# EAGLE board charlie_matrix_30 (EAGLE 5.11)
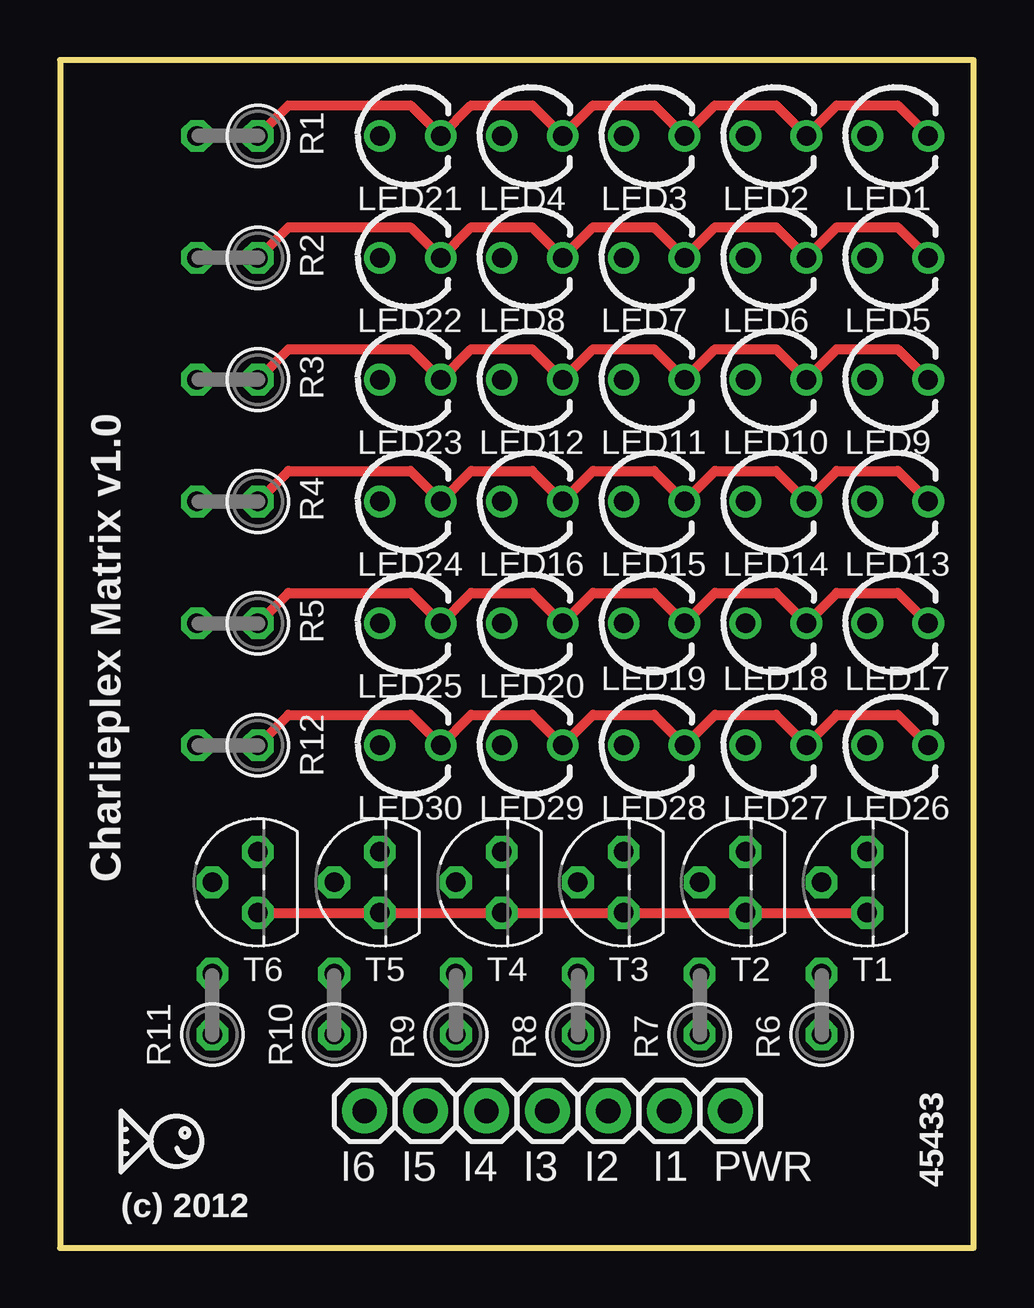
[diagram p0: board, top side]
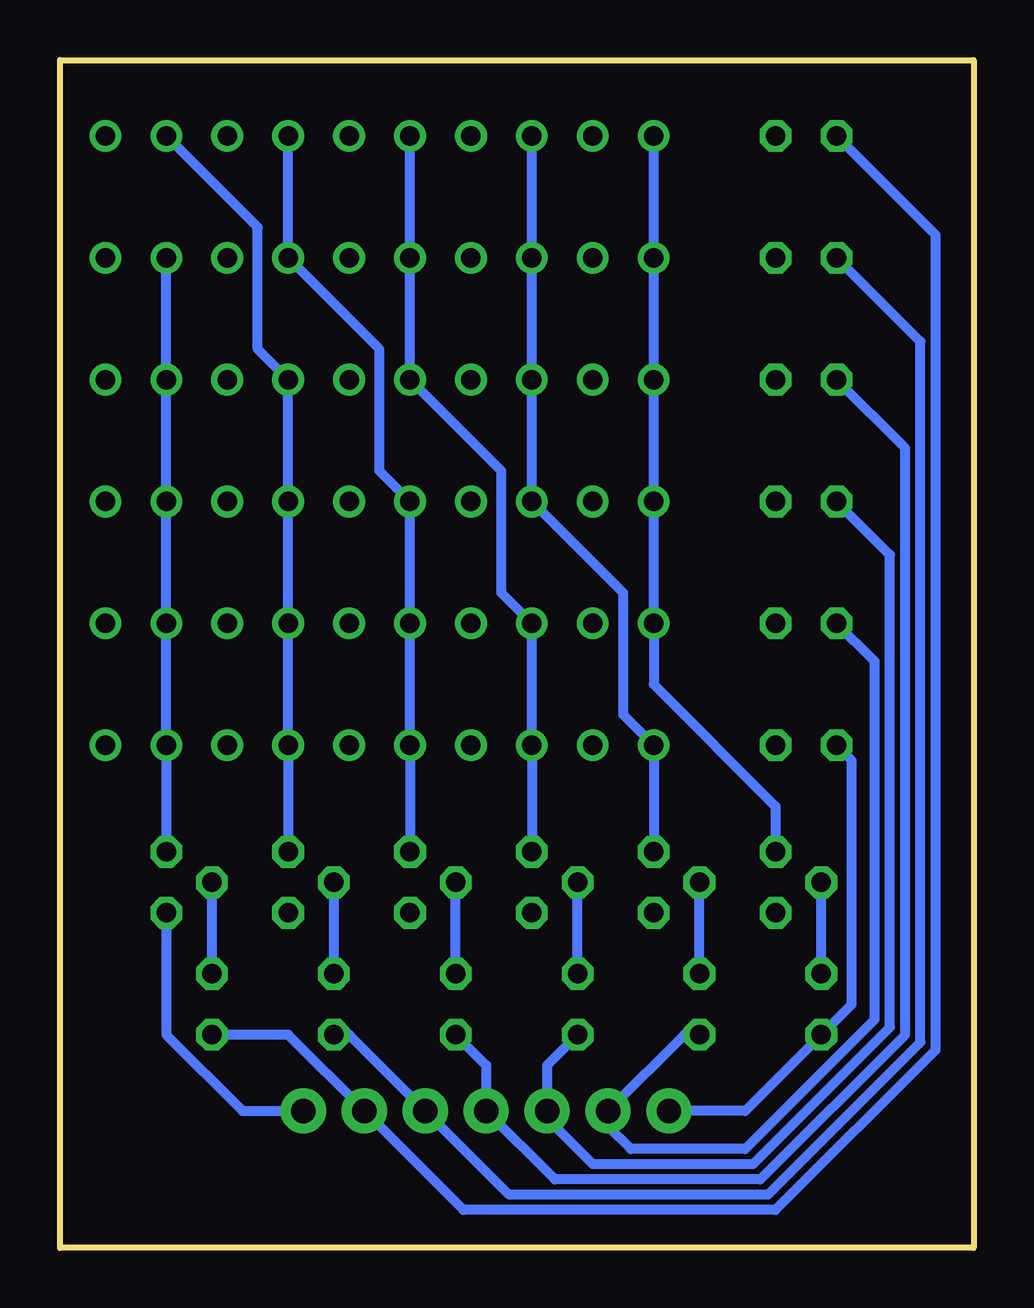
[diagram p1: board, bottom side, seen from below]

Size 38.09 x 49.52 mm. Coordinates in mm from the lower left corner, seen from the top.
Outline: 0,0 38.09,0 38.09,49.52 0,49.52 0,0
Copper layers (1*16): Top 0.035mm / dielectric 1.5mm / Bottom 0.035mm
Design rules "Fusion_eagle_rule_v1.1": minimum track width 6mil, minimum drill 12mil, track to track 6mil, track to pad 6mil, pad to pad 6mil, via to via 6mil, smd to smd 0mil, copper to edge 10mil, drill to drill 10mil, minimum pad ring 10mil, minimum via ring 6mil, stop-mask expansion 2mil, vias tented up to drill 100mil, thermal gap 10mil

## Footprints (pad centres in the part's own frame; a part is rotated, then mirrored left to right if it is on the bottom)
1X01 = drill 1.016 pad 1.88 round: 1 0,0
LED3MM = drill 0.813 round: A -1.27,0; K 1.27,0
0207/2V = drill 0.813 octagon: 1 -1.27,0; 2 1.27,0
TO92 = drill 0.813 octagon: 1 1.27,0; 2 0,1.905; 3 -1.27,0

## Placement (x,y rotation side)
I1  M01PTH  [1X01]  25.4,5.71 0 top
I2  M01PTH  [1X01]  22.86,5.71 0 top
I3  M01PTH  [1X01]  20.32,5.71 0 top
I4  M01PTH  [1X01]  17.78,5.71 0 top
I5  M01PTH  [1X01]  15.24,5.71 0 top
I6  M01PTH  [1X01]  12.7,5.71 0 top
LED1  [LED3MM]  34.92,46.35 0 top
LED2  [LED3MM]  29.84,46.35 0 top
LED3  [LED3MM]  24.77,46.35 0 top
LED4  [LED3MM]  19.68,46.35 0 top
LED5  [LED3MM]  34.92,41.27 0 top
LED6  [LED3MM]  29.84,41.27 0 top
LED7  [LED3MM]  24.77,41.27 0 top
LED8  [LED3MM]  19.68,41.27 0 top
LED9  [LED3MM]  34.92,36.2 0 top
LED10  [LED3MM]  29.84,36.2 0 top
LED11  [LED3MM]  24.77,36.2 0 top
LED12  [LED3MM]  19.68,36.2 0 top
LED13  [LED3MM]  34.92,31.11 0 top
LED14  [LED3MM]  29.84,31.11 0 top
LED15  [LED3MM]  24.77,31.11 0 top
LED16  [LED3MM]  19.68,31.11 0 top
LED17  [LED3MM]  34.92,26.04 0 top
LED18  [LED3MM]  29.84,26.04 0 top
LED19  [LED3MM]  24.77,26.04 0 top
LED20  [LED3MM]  19.68,26.04 0 top
LED21  [LED3MM]  14.61,46.35 0 top
LED22  [LED3MM]  14.61,41.27 0 top
LED23  [LED3MM]  14.61,36.2 0 top
LED24  [LED3MM]  14.61,31.11 0 top
LED25  [LED3MM]  14.61,26.04 0 top
LED26  [LED3MM]  34.92,20.95 0 top
LED27  [LED3MM]  29.84,20.95 0 top
LED28  [LED3MM]  24.77,20.95 0 top
LED29  [LED3MM]  19.68,20.95 0 top
LED30  [LED3MM]  14.61,20.95 0 top
PWR  M01PTH  [1X01]  27.94,5.71 0 top
R1  [0207/2V]  6.99,46.35 180 top
R2  [0207/2V]  6.99,41.27 180 top
R3  [0207/2V]  6.99,36.2 180 top
R4  [0207/2V]  6.99,31.11 180 top
R5  [0207/2V]  6.99,26.04 180 top
R6  [0207/2V]  31.75,10.16 90 top
R7  [0207/2V]  26.67,10.16 90 top
R8  [0207/2V]  21.59,10.16 90 top
R9  [0207/2V]  16.51,10.16 90 top
R10  [0207/2V]  11.43,10.16 90 top
R11  [0207/2V]  6.35,10.16 90 top
R12  [0207/2V]  6.99,20.95 180 top
T1  BC238  [TO92]  33.66,15.24 90 top
T2  BC238  [TO92]  28.57,15.24 90 top
T3  BC238  [TO92]  23.5,15.24 90 top
T4  BC238  [TO92]  18.41,15.24 90 top
T5  BC238  [TO92]  13.34,15.24 90 top
T6  BC238  [TO92]  8.26,15.24 90 top
U$1  FHI_LOGO  [FHI_LOGO]  3.81,4.45 0 top

## Library data of the parts
I1-I6 PWR = SparkFun
LED1-LED30 R1-R12 U$1 = CyberRailGuru
T1-T6 = transistor-neu-to92

## Nets
N$1: LED17.K LED18.K LED19.K LED20.K LED25.K R5.1
N$2: LED13.K LED14.K LED15.K LED16.K LED24.K R4.1
N$3: LED9.K LED10.K LED11.K LED12.K LED23.K R3.1
N$4: LED5.K LED6.K LED7.K LED8.K LED22.K R2.1
N$5: LED1.K LED2.K LED3.K LED4.K LED21.K R1.1
N$6: LED4.A LED8.A LED12.A LED16.A LED30.A T5.1
N$7: LED3.A LED7.A LED11.A LED20.A LED29.A T4.1
N$8: LED2.A LED6.A LED15.A LED19.A LED28.A T3.1
N$9: LED21.A LED22.A LED23.A LED24.A LED25.A T6.1
N$10: LED5.A LED9.A LED13.A LED17.A LED26.A T1.1
N$11: R11.2 T6.2
N$13: LED26.K LED27.K LED28.K LED29.K LED30.K R12.1
N$14: LED1.A LED10.A LED14.A LED18.A LED27.A T2.1
N$15: R6.2 T1.2
N$16: R7.2 T2.2
N$17: R8.2 T3.2
N$18: R9.2 T4.2
N$19: R10.2 T5.2
OUT1: I1.1 R1.2 R6.1
OUT2: I2.1 R2.2 R7.1
OUT3: I3.1 R3.2 R8.1
OUT4: I4.1 R4.2 R9.1
OUT5: I5.1 R5.2 R10.1
OUT6: I6.1 R11.1 R12.2
VCC: PWR.1 T1.3 T2.3 T3.3 T4.3 T5.3 T6.3

## Tracks (layer width: path | path; a pad name or v marks a point on that pad's centre or on a via)
N$1
  Top 0.406: LED17.K 34.92,27.3 32.38,27.3 LED18.K 29.84,27.3 27.3,27.3 LED19.K 24.77,27.3 22.23,27.3 LED20.K 19.68,27.3 17.14,27.3 LED25.K 14.61,27.3 9.53,27.3 R5.1
N$2
  Top 0.406: LED13.K 34.92,32.38 32.38,32.38 LED14.K 29.84,32.38 27.3,32.38 LED15.K 24.77,32.38 22.23,32.38 LED16.K 19.68,32.38 17.14,32.38 LED24.K 14.61,32.38 9.53,32.38 R4.1
N$3
  Top 0.406: LED9.K 34.92,37.47 32.38,37.47 LED10.K 29.84,37.47 27.3,37.47 LED11.K 24.77,37.47 22.23,37.47 LED12.K 19.68,37.47 17.14,37.47 LED23.K 14.61,37.47 9.53,37.47 R3.1
N$4
  Top 0.406: LED5.K 34.92,42.55 32.38,42.55 LED6.K 29.84,42.55 27.3,42.55 LED7.K 24.77,42.55 22.23,42.55 LED8.K 19.68,42.55 17.14,42.55 LED22.K 14.61,42.55 9.53,42.55 R2.1
N$5
  Top 0.406: LED1.K 34.92,47.62 32.38,47.62 LED2.K 29.84,47.62 27.3,47.62 LED3.K 24.77,47.62 22.23,47.62 LED4.K 19.68,47.62 17.14,47.62 LED21.K 14.61,47.62 9.53,47.62 R1.1
N$6
  Bottom 0.406: LED4.A LED8.A LED12.A LED16.A 14.61,27.3 14.61,22.23 LED30.A T5.1
N$7
  Bottom 0.406: LED3.A LED7.A LED11.A 19.68,32.38 19.68,27.3 LED20.A LED29.A T4.1
N$8
  Bottom 0.406: LED2.A LED6.A 24.77,37.47 24.77,32.38 LED15.A LED19.A LED28.A T3.1
N$9
  Bottom 0.406: LED21.A LED22.A LED23.A LED24.A LED25.A 13.34,23.5 8.26,18.41 T6.1
N$10
  Bottom 0.406: LED5.A LED9.A LED13.A LED17.A LED26.A T1.1
N$11
  Bottom 0.406: R11.2 T6.2
N$13
  Top 0.406: LED26.K 34.92,22.23 32.38,22.23 LED27.K 29.84,22.23 27.3,22.23 LED28.K 24.77,22.23 22.23,22.23 LED29.K 19.68,22.23 17.14,22.23 LED30.K 14.61,22.23 9.53,22.23 R12.1
N$14
  Bottom 0.406: LED1.A 29.84,42.55 29.84,37.47 LED10.A LED14.A LED18.A LED27.A T2.1
N$15
  Bottom 0.406: R6.2 T1.2
N$16
  Bottom 0.406: R7.2 T2.2
N$17
  Bottom 0.406: R8.2 T3.2
N$18
  Bottom 0.406: R9.2 T4.2
N$19
  Bottom 0.406: R10.2 T5.2
OUT1
  Bottom 0.406: R1.2 1.59,42.23 1.59,8.26 8.26,1.59 21.27,1.59 I1.1 28.57,8.89 R6.1
OUT2
  Bottom 0.406: R2.2 2.22,37.78 2.22,8.57 8.57,2.22 19.37,2.22 I2.1 26.04,8.89 R7.1
OUT3
  Bottom 0.406: R3.2 2.86,33.34 2.86,8.89 8.89,2.86 17.46,2.86 I3.1 20.32,7.62 R8.1
OUT4
  Bottom 0.406: R4.2 3.49,28.89 3.49,9.21 9.21,3.49 15.88,3.49 17.78,5.4 I4.1 17.78,7.62 R9.1
OUT5
  Bottom 0.406: R5.2 4.13,24.45 4.13,9.53 9.53,4.13 14.29,4.13 15.24,5.08 I5.1 12.06,8.89 R10.1
OUT6
  Bottom 0.406: R12.2 5.08,20.32 5.08,10.16 R11.1 9.53,5.71 I6.1
VCC
  Top 0.406: T6.3 T5.3 T4.3 T3.3 T2.3 T1.3
  Bottom 0.406: PWR.1 30.48,5.71 33.66,8.89 T1.3

## Text on the board
tNames: Charlieplex Matrix v1.0 | 45433 | (c) 2012